# Altium PCB LMC (1).PcbDoc
Units mm, origin at the board's own origin, x right, y up, seen from the top; angles counter-clockwise.
Board outline 25.11 x 21.41 mm, 2 copper layers (Top Layer, Bottom Layer); 54 components, 27 nets, 122 pads, 19 vias.
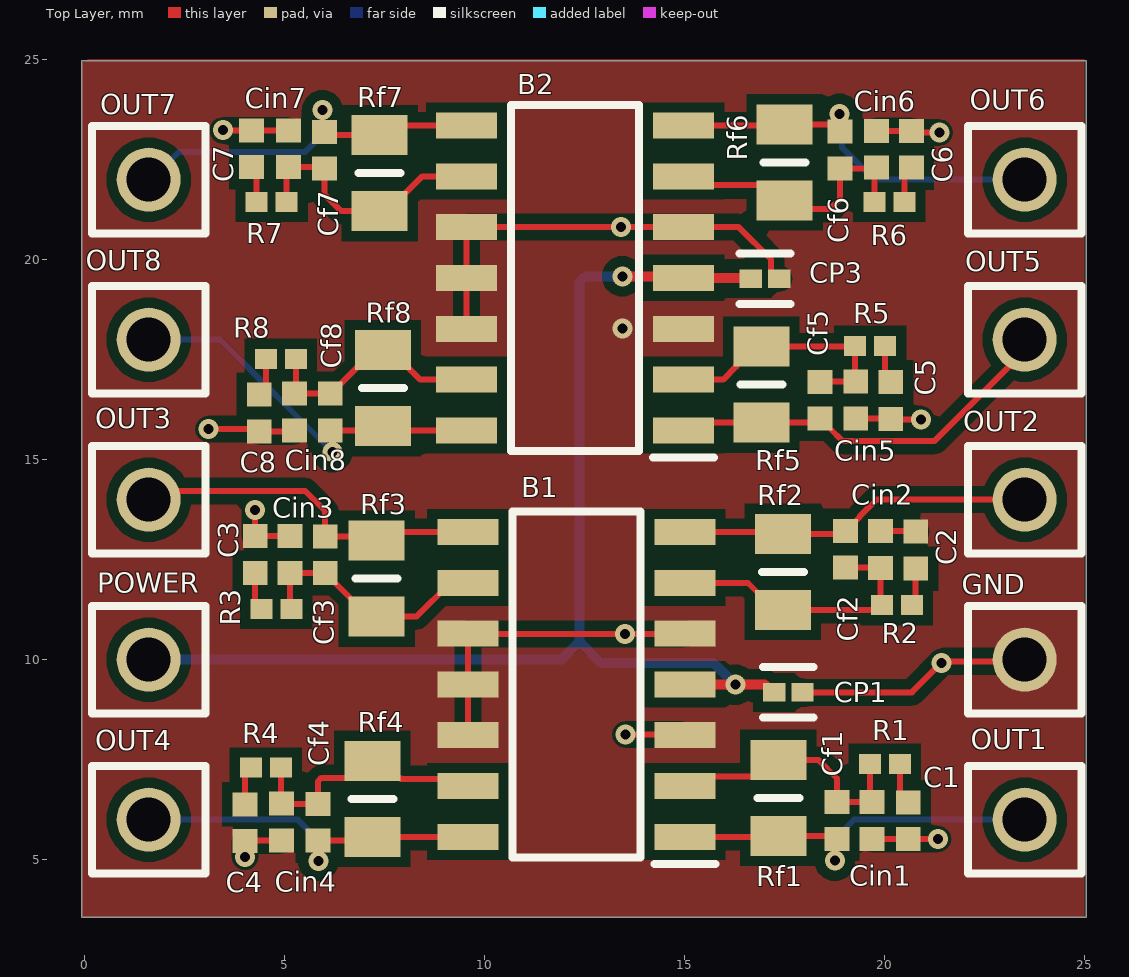
[diagram p0: Top Layer view]
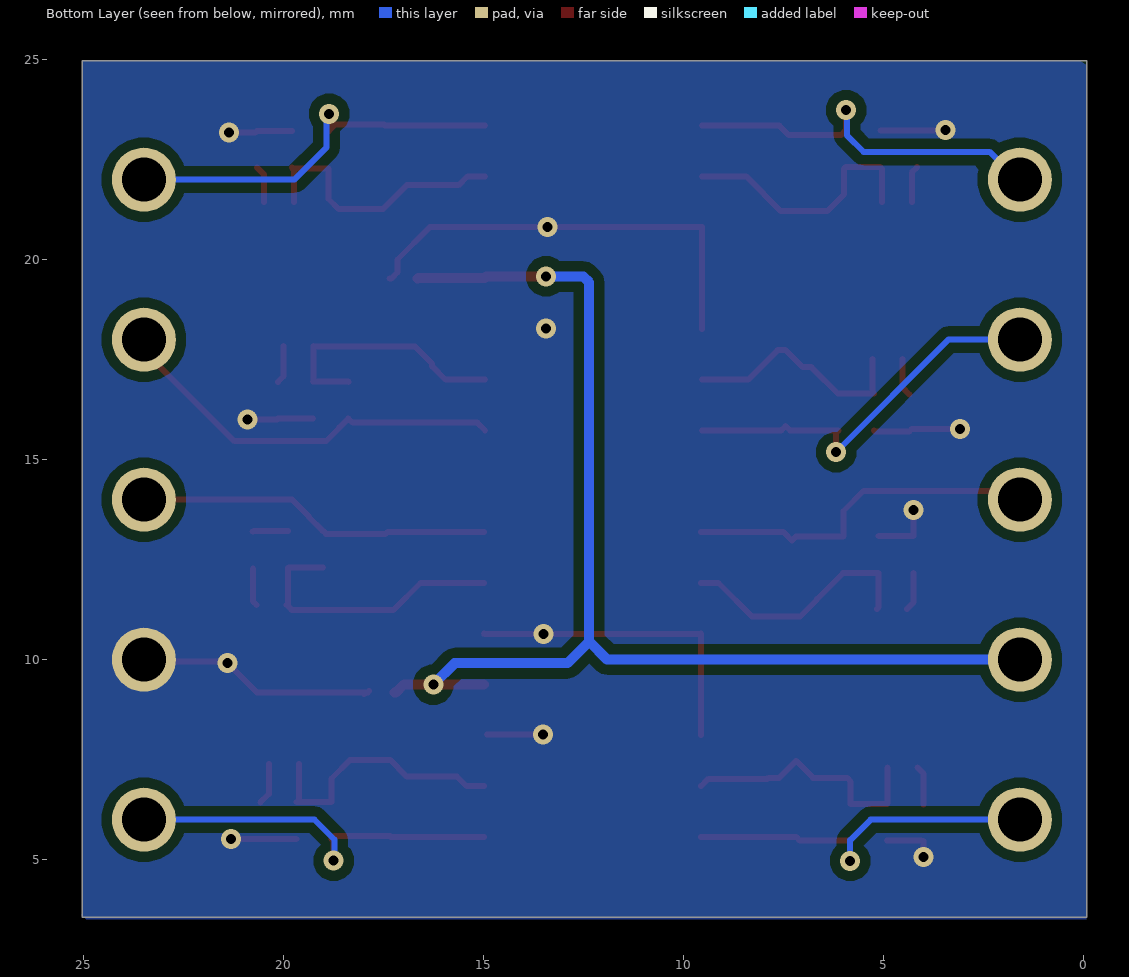
[diagram p1: Bottom Layer view, seen from below]

## Layer stack, top to bottom
Top Solder: solder mask 0.0102, Solder Resist, Dk 3.5
Top Layer: signal copper 0.0356
Dielectric 1: dielectric 0.32, FR-4, Dk 4.8
Bottom Layer: signal copper 0.0356
Bottom Solder: solder mask 0.0102, Solder Resist, Dk 3.5

## Board outline
-0.07,3.566 -0.07,24.978 25.043,24.978 25.043,3.566

## Design rules (kind name [scope] priority, off if disabled: settings)
Clearance [All] p1: gap=0.25 ignorepadtopadclearanceinfootprint=FALSE except(0.1: Arc-Text Track-Text SMDPad-Text THPad-Text Via-Text Fill-Text Poly-Text Region-Text Text-Text; 0.12: Arc-Arc Arc-Track Track-Track; 0.125: Arc-SMDPad Track-SMDPad; 0.15: Arc-Via Track-Via; 0.2: Arc-THPad Track-THPad)
HoleSize [All] p1: absolutevalues=TRUE maxlimit=0.5 minlimit=0.25 maxpercent=80.000 minpercent=20.000
HoleToHoleClearance [All] p1: gap=0.25 allowstackedmicrovias=TRUE
PolygonConnect [All] p1: connectstyle=Direct reliefconductorwidth=0.254 reliefentries=4 polygonreliefangle="90 Angle" airgapwidth=0.254
RoutingVias [All] p1: holewidth=0.25 width=0.5 viastyle="Through Hole" minholewidth=0.25 minwidth=0.5 maxholewidth=0.25 maxwidth=0.5
SilkToSolderMaskClearance [IsPad] p1: minsilkscreentomaskgap=0.1 clearancetoexposedcopper=TRUE
SolderMaskExpansion [All] p1: expansion=0.05 istentingtop=FALSE
SupplyNets "Schematic Supply Nets" [InNet('GND')] p1: voltage=0.000
Width [All] p1: maxlimit=0.15 minlimit=0.15 preferedwidth=0.15 minimp=50.000000 maximp=50.000000 favimp=50.000000
27 further rules are at their usual default settings.

## Components (designator, comment, footprint, x,y, rotation, side; value= is the part's Value field where it differs from the comment)
B1 "LMC6084IMX_NOPB" SOIC127P600X175-14N 12.29,9.381 r180 top
B2 "LMC6084IMX_NOPB" SOIC127P600X175-14N 12.26,19.542 r180 top
C1 "GJM1555C1HR20WB01D" CAPC1005X55N 20.587,5.971 r90 top
C2 "GJM1555C1HR20WB01D" CAPC1005X55N 20.774,12.738 r270 top
C3 "GJM1555C1HR20WB01D" CAPC1005X55N 4.261,12.631 r270 top
C4 "GJM1555C1HR20WB01D" CAPC1005X55N 4.005,5.923 r90 top
C5 "GJM1555C1HR20WB01D" CAPC1005X55N 20.152,16.482 r90 top
C6 "GJM1555C1HR20WB01D" CAPC1005X55N 20.669,22.761 r270 top
C7 "GJM1555C1HR20WB01D" CAPC1005X55N 4.169,22.774 r270 top
C8 "GJM1555C1HR20WB01D" CAPC1005X55N 4.364,16.169 r90 top
Cf1 "GJM1555C1HR20WB01D" CAPC1005X55N 18.809,5.983 r90 top
Cf2 "GJM1555C1HR20WB01D" CAPC1005X55N 19.019,12.761 r270 top
Cf3 "GJM1555C1HR20WB01D" CAPC1005X55N 6.011,12.621 r270 top
Cf4 "GJM1555C1HR20WB01D" CAPC1005X55N 5.83,5.934 r90 top
Cf5 "GJM1555C1HR20WB01D" CAPC1005X55N 18.384,16.486 r90 top
Cf6 "GJM1555C1HR20WB01D" CAPC1005X55N 18.885,22.745 r270 top
Cf7 "GJM1555C1HR20WB01D" CAPC1005X55N 5.992,22.736 r270 top
Cf8 "GJM1555C1HR20WB01D" CAPC1005X55N 6.138,16.189 r90 top
Cin1 "GJM1555C1HR20WB01D" CAPC1005X55N 19.681,5.978 r90 top
Cin2 "GJM1555C1HR20WB01D" CAPC1005X55N 19.898,12.751 r270 top
Cin3 "GJM1555C1HR20WB01D" CAPC1005X55N 5.133,12.631 r270 top
Cin4 "GJM1555C1HR20WB01D" CAPC1005X55N 4.918,5.944 r90 top
Cin5 "GJM1555C1HR20WB01D" CAPC1005X55N 19.276,16.488 r90 top
Cin6 "GJM1555C1HR20WB01D" CAPC1005X55N 19.794,22.761 r270 top
Cin7 "GJM1555C1HR20WB01D" CAPC1005X55N 5.092,22.774 r270 top
Cin8 "GJM1555C1HR20WB01D" CAPC1005X55N 5.246,16.189 r90 top
CP1 "GRM0335C1ER10WA01D" FP-GRM033-0_03-IPC_A 17.593,9.184 r0 top
CP3 "GRM0335C1ER10WA01D" FP-GRM033-0_03-IPC_A 17.008,19.525 r0 top
GND "61300111121" 61300111121 23.5,10 r0 top
OUT1 "61300111121" 61300111121 23.5,6 r0 top
OUT2 "61300111121" 61300111121 23.5,14 r0 top
OUT3 "61300111121" 61300111121 1.6,14 r0 top
OUT4 "61300111121" 61300111121 1.6,6 r0 top
OUT5 "61300111121" 61300111121 23.5,18 r0 top
OUT6 "61300111121" 61300111121 23.5,22 r0 top
OUT7 "61300111121" 61300111121 1.6,22 r0 top
OUT8 "61300111121" 61300111121 1.6,18 r0 top
POWER "61300111121" 61300111121 1.6,10 r0 top
R1 "CRG0402F470K" RESC1005X40X25LL10T10 20.003,7.397 r180 top
R2 "CRG0402F470K" RESC1005X40X25LL10T10 20.304,11.366 r180 top
R3 "CRG0402F470K" RESC1005X40X25LL10T10 4.791,11.271 r0 top
R4 "CRG0402F470K" RESC1005X40X25LL10T10 4.531,7.3 r180 top
R5 "CRG0402F470K" RESC1005X40X25LL10T10 19.635,17.844 r180 top
R6 "CRG0402F470K" RESC1005X40X25LL10T10 20.12,21.447 r180 top
R7 "CRG0402F470K" RESC1005X40X25LL10T10 4.676,21.445 r0 top
R8 "CRG0402F470K" RESC1005X40X25LL10T10 4.905,17.518 r180 top
Rf1 "RHC20100GMTP" RESC2012X65N 17.344,6.544 r270 top
Rf2 "RHC20100GMTP" RESC2012X65N 17.456,12.194 r90 top
Rf3 "RHC20100GMTP" RESC2012X65N 7.296,12.027 r90 top
Rf4 "RHC20100GMTP" RESC2012X65N 7.194,6.518 r270 top
Rf5 "RHC20100GMTP" RESC2012X65N 16.918,16.874 r270 top
Rf6 "RHC20100GMTP" RESC2012X65N 17.499,22.431 r90 top
Rf7 "RHC20100GMTP" RESC2012X65N 7.376,22.165 r90 top
Rf8 "RHC20100GMTP" RESC2012X65N 7.455,16.79 r270 top

## Footprints (in the part's own frame and the unit in brackets; to place one, negate y for a bottom-side part, rotate by r counter-clockwise, add the part's x,y. Pads: shape width x height; smd on the part's side, far side on the other; paste and mask are expansions set on the pad)
61300111121 [mm] "Pin Header, pitch 2.54 mm, THT, Vertical, single row, 1p"
  round 1.6 hole 1.1: 1(0,0)
  silkscreen extent -1.42,-1.35 1.42,1.35, body extent -1.27,-1.27 1.27,1.27, height 8.57
CAPC1005X55N [mm]
  rect 0.6x0.62 smd: 1(-0.46,0) 2(0.46,0)
FP-GRM033-0_03-IPC_A [mm]
  rect 0.554x0.463 smd paste+0 mask+0: 1(-0.354,0) 2(0.354,0)
  silkscreen extent -0.63,-0.63 0.63,0.63, body extent -0.83,-0.43 0.83,0.43, height 0.25
RESC1005X40X25LL10T10 [mm] "Chip Resistor, 2-Leads, Body 1.00x0.50mm, IPC High Density"
  rect 0.55x0.5 smd: 1(-0.375,0) 2(0.375,0)
  body extent -0.55,-0.3 0.55,0.3, height 0.4
RESC2012X65N [mm]
  rect 1x1.4 smd: 1(-0.95,0) 2(0.95,0)
  silkscreen extent 0,-0.53 0,0.53
SOIC127P600X175-14N [mm] "LMC6084"
  rect 1.525x0.65 smd: 1(-2.712,3.81) 2(-2.712,2.54) 3(-2.712,1.27) 4(-2.712,0) 5(-2.712,-1.27) 6(-2.712,-2.54) 7(-2.712,-3.81) 8(2.712,-3.81) 9(2.712,-2.54) 10(2.712,-1.27) 11(2.712,0) 12(2.712,1.27) 13(2.712,2.54) 14(2.712,3.81)
  silkscreen extent -3.47,-4.33 1.6,4.48

## Part data
B1 B2: "Precision CMOS Quad Operational Amplifier", Arrow Part Number=LMC6084IMX/NOPB, Manufacturer_Name="Texas Instruments", Mouser Part Number=926-LMC6084IMX/NOPB, Arrow Price/Stock=https://www.arrow.com/en/products/lmc6084imxnopb/texas-instruments, Datasheet Link=http://www.ti.com/lit/gpn/LMC6084, Geometry.Height=1.75mm, Manufacturer_Part_Number=LMC6084IMX/NOPB, Mouser Price/Stock=https://www.mouser.com/Search/Refine.aspx?Keyword=926-LMC6084IMX%2FNOPB
C1 C2 C3 C4 C5 C6 C7 C8 Cf1 Cf2 Cf3 Cf4 Cf5 Cf6 Cf7 Cf8 Cin1 Cin2 Cin3 Cin4 Cin5 Cin6 Cin7 Cin8: "Capacitor GJM15_0.10 L=1.0mm W=0.5mm T=0.5mm", Manufacturer_Name="Murata Electronics", Mouser Part Number=81-GJM1555C1HR20WB01, Arrow Part Number=GJM1555C1HR20WB01D, Arrow Price/Stock=https://www.arrow.com/en/products/gjm1555c1hr20wb01d/murata-manufacturing?region=nac, Datasheet Link=https://search.murata.co.jp/Ceramy/image/img/A01X/G101/ENG/GJM1555C1HR20WB01-01A.pdf, Geometry.Height=0.55mm, Manufacturer_Part_Number=GJM1555C1HR20WB01D, Mouser Price/Stock=https://www.mouser.co.uk/ProductDetail/Murata-Electronics/GJM1555C1HR20WB01D?qs=FE4FjJMnrEJXJfS2X%252B8lsg%3D%3D
CP1 CP3: library part CMP-2010-01060-2, "Chip Multilayer Ceramic Capacitors for General Purpose, 0201, 0.10pF, C0G, 30ppm/°C, 0.05pF, 25V", Capacitance=0.1pF, Case Code (Imperial)=0201, Case Code (Metric)=0603, Dielectric=C0G, Max Operating Temperature=125°C, Min Operating Temperature=-55°C, Package Quantity=15000, Voltage Rating=25V, Case/Package=0201, Height=0.3mm, Lead Free="Lead Free", Length=0.024inch, Mount="Surface Mount", Packaging="Tape and Reel", Termination=SMD/SMT, Thickness=0.013inch, Voltage Rating (DC)=25V, Width=0.012inch
GND OUT1 OUT2 OUT3 OUT4 OUT5 OUT6 OUT7 OUT8 POWER: library part CMP-1502-01058-4, "THT Vertical Pin Header WR-PHD, Pitch 2.54 mm, Single Row, 1 pins", Color=Black, Contact Resistance=20mΩ, Current Rating=3A, Operating Supply Voltage=250V, Connector Type="Male Pin", Contact Material=Copper, Contact Mating Length=5.9944mm, Contact Plating=Gold, Gender=Male, Lead Pitch=2.54mm, Mount="Through Hole", Number of Contacts=1, Number of Pins=1, Number of Positions=1, Number of Rows=1, Orientation=Vertical, Packaging=Bulk, RoHS=Compliant, Termination=Solder
R1 R2 R3 R4 R5 R6 R7 R8: library part CMP-2002-05737-1, Manufacturer="TE Connectivity / AMP", Part Number=CRG0402F470K
Rf1 Rf2 Rf3 Rf4 Rf5 Rf6 Rf7 Rf8: "Thick Film Resistors - SMD 0805 100G 20%", Manufacturer_Name=Kamaya, Mouser Part Number=791-RHC20100GMTP, Datasheet Link=https://eu.mouser.com/datasheet/2/210/kamaya_products_RHC__english_20170203_112609-1842538.pdf, Geometry.Height=0.65mm, Manufacturer_Part_Number=RHC20100GMTP, Mouser Price/Stock=https://www.mouser.co.uk/ProductDetail/Kamaya/RHC20100GMTP?qs=JZJGM%252BYuqVpxyCC7WQOUCw%3D%3D

## Via types
v1: diameter 0.5, hole 0.25, Top Layer to Bottom Layer, 19 vias

## Nets (pads, with @x,y where several pads share a name; then routed paths per layer and width w, separated by ;. In a path a pad name is that pad's centre, name@x,y a point inside that pad or via, vN(x,y) a via of type N, cw(c..) or ccw(c..) an arc to the next point about the centre after c; other vN are vias at no path point)
GND: B1.3 B1.5 B1.10 B1.11 B1.12 B2.3 B2.5 B2.10 B2.11 B2.12 C1.1 C2.1 C3.1 C4.1 C5.1 C6.1 C7.1 C8.1 Cin1.1 Cin2.1 Cin3.1 Cin4.1 Cin5.1 Cin6.1 Cin7.1 Cin8.1 CP1.2 CP3.2 GND.1 | length 38.9
  Top Layer w0.15: v1(3.1,15.764) 4.308,15.764 C8.1 5.225,15.709 Cin8.1 ; v1@3.457,23.234 C7.1 ; C4.1 4.01,5.458 v1(4.01,5.069) ; C4.1@4.025,5.443 4.065,5.484 Cin4.1 ; C7.1@4.172,23.231 Cin7.1@5.089,23.231 ; v1(4.26,13.743) C3.1 C3.1 Cin3.1 ; B2.12 B2.11 B2.10 v1(13.413,20.812) B2.5 ; B1.12 B1.11 B1.10 9.592,10.637 v1(13.505,10.637) 14.988,10.637 B1.5 ; v1(13.518,8.131) B1.3@14.927,8.131 ; B2.5 16.351,20.812 17.16,20.003 17.16,19.681 17.316,19.525 CP3.2 ; CP1.2@17.872,9.212 17.901,9.184 CP1.2 ; CP1.2@17.993,9.138 CP1.2 ; Cin5.1 20.145,16.028 20.163,16.01 v1(20.909,16.01) ; Cin1.1 20.58,5.518 C1.1 20.591,5.515 v1(21.328,5.515) ; Cin6.1 C6.1 20.713,23.177 v1(21.37,23.177) ; Cin2.1 20.761,13.211 C2.1 C2.1@20.784,13.198 ; GND.1 23.461,9.961 21.454,9.961 v1(21.414,9.921) 20.677,9.184 CP1.2
  other v1: 13.449,18.281 3.455,23.236
INV_A1: B1.2 Cf1.2 Cin1.2 R1.2 Rf1.1 | length 6.7
  Top Layer w0.15: B1.2@14.996,6.837 15.433,6.837 15.671,7.075 16.925,7.075 Rf1.1 18.343,7.494 18.809,7.028 Cf1.2 19.676,6.443 Cin1.2 19.628,6.491 R1.2
INV_A2: B2.2 Cf5.2 Cin5.2 R5.2 Rf5.1 | length 6.5
  Top Layer w0.15: B2.2 15.96,17.002 16.293,17.335 16.293,17.399 16.718,17.824 Rf5.1 19.239,17.824 R5.2 19.26,16.964 Cin5.2 18.387,16.948 Cf5.2
INV_B1: B1.6 Cf2.2 Cin2.2 R2.2 Rf2.1 | length 7.1
  Top Layer w0.15: B1.6@14.996,11.917 16.583,11.917 17.256,11.244 Rf2.1 19.807,11.244 R2.2 19.898,11.396 Cin2.2 19.889,12.301 Cf2.2
INV_B2: B2.6 Cf6.2 Cin6.2 R6.2 Rf6.1 | length 6.9
  Top Layer w0.15: B2.6 15.41,22.082 15.631,21.861 16.928,21.861 17.517,21.272 18.639,21.272 18.885,21.518 Cf6.2 19.778,22.285 Cin6.2 19.745,22.251 R6.2
INV_C1: B1.9 Cf3.2 Cin3.2 R3.2 Rf3.1 | length 6.2
  Top Layer w0.15: R3.2 5.133,11.304 Cin3.2 6.002,12.171 Cf3.2 6.021,12.161 6.671,11.511 6.671,11.502 7.096,11.077 Rf3.1 8.294,11.077 9.134,11.917 B1.9@9.572,11.917
INV_C2: B2.9 Cf7.2 Cin7.2 R7.2 Rf7.1 | length 6.5
  Top Layer w0.15: R7.2 5.051,22.272 Cin7.2 5.954,22.314 Cf7.2 5.992,21.638 6.415,21.215 7.576,21.215 8.443,22.082 B2.9
INV_D1: B1.13 Cf4.2 Cin4.2 R4.1 Rf4.1 | length 6.6
  Top Layer w0.15: R4.1 4.906,6.415 Cin4.2 4.928,6.394 Cf4.2 5.83,6.955 5.918,7.043 6.769,7.043 Rf4.1 7.619,7.043 7.886,7.043 7.907,7.022 9.387,7.022 B1.13@9.572,6.837
INV_D2: B2.13 Cf8.2 Cin8.2 R8.1 Rf8.1 | length 5.9
  Top Layer w0.15: R8.1 5.28,16.684 Cin8.2 Cf8.2 6.148,16.649 6.813,17.315 7.03,17.315 Rf8.1 7.655,17.74 8.393,17.002 B2.13
NetC1_2: C1.2 R1.1 | length 1.1
  Top Layer w0.15: R1.1 20.378,6.64 C1.2
NetC2_2: C2.2 R2.1 | length 1
  Top Layer w0.15: R2.1 20.774,11.461 C2.2
NetC3_2: C3.2 R3.1 | length 1
  Top Layer w0.15: C3.2 4.261,11.426 R3.1
NetC4_2: C4.2 R4.2 | length 1
  Top Layer w0.15: C4.2 4.005,7.149 R4.2
NetC5_2: C5.2 R5.1 | length 1
  Top Layer w0.15: R5.1 20.01,17.084 C5.2
NetC6_2: C6.2 R6.1 | length 0.9
  Top Layer w0.15: R6.1 20.495,22.126 C6.2
NetC7_2: C7.2 R7.1 | length 0.9
  Top Layer w0.15: C7.2 4.301,22.182 R7.1
NetC8_2: C8.2 R8.2 | length 1
  Top Layer w0.15: C8.2 4.53,16.795 R8.2
OUTPUT1: B1.1 Cf1.1 OUT1.1 Rf1.2 | length 9.9
  Top Layer w0.15: B1.1 17.321,5.571 Rf1.2 18.737,5.594 Cf1.1 18.755,5.47 v1(18.755,4.974)
  Bottom Layer w0.15: v1(18.755,4.974) 18.734,4.995 18.734,5.501 19.233,6 OUT1.1
OUTPUT2: B1.7 Cf2.1 OUT2.1 Rf2.2 | length 8.9
  Top Layer w0.15: B1.7 17.409,13.191 Rf2.2 18.942,13.144 Cf2.1 19.029,13.221 19.388,13.58 19.388,13.594 19.794,14 OUT2.1
OUTPUT3: B1.8 Cf3.1 OUT3.1 Rf3.2 | length 9
  Top Layer w0.15: OUT3.1 1.818,14.218 5.509,14.218 6.01,13.717 Cf3.1@6.01,13.081 ; Cf3.1 7.192,13.081 Rf3.2 7.507,13.187 B1.8@9.572,13.187
OUTPUT4: B1.14 Cf4.1 OUT4.1 Rf4.2 | length 9.3
  Top Layer w0.15: v1(5.842,4.968) 5.842,5.462 Cf4.1 7.1,5.474 Rf4.2 9.571,5.568 B1.14@9.572,5.567
  Bottom Layer w0.15: OUT4.1 5.329,6 5.842,5.487 v1(5.842,4.968)
OUTPUT5: B2.1 Cf5.1 OUT5.1 Rf5.2 | length 10.1
  Top Layer w0.15: B2.1 15.164,15.924 Rf5.2 18.282,15.924 Cf5.1 18.394,16.026 18.619,15.801 18.619,15.792 18.948,15.463 21.24,15.463 23.5,17.723 OUT5.1
OUTPUT6: B2.7 Cf6.1 OUT6.1 Rf6.2 | length 10.2
  Top Layer w0.15: B2.7 17.471,23.352 Rf6.2 18.709,23.381 Cf6.1 18.87,23.22 v1(18.87,23.646)
  Bottom Layer w0.15: v1(18.87,23.646) 18.938,23.578 18.938,22.8 19.738,22 OUT6.1
OUTPUT7: B2.8 Cf7.1 OUT7.1 Rf7.2 | length 9.7
  Top Layer w0.15: v1(5.944,23.738) 5.944,23.243 6.073,23.115 Rf7.2 7.613,23.352 B2.8
  Bottom Layer w0.15: OUT7.1 1.663,22 2.356,22.693 5.509,22.693 5.925,23.109 5.925,23.68 5.935,23.69 5.935,23.729 v1(5.944,23.738)
OUTPUT8: B2.14 Cf8.1 OUT8.1 Rf8.2 | length 9.8
  Top Layer w0.15: Cf8.1@6.128,15.729 7.345,15.729 Rf8.2 7.563,15.732 B2.14 ; Cf8.1 6.195,15.672 v1(6.195,15.191)
  Bottom Layer w0.15: OUT8.1 3.386,18 v1(6.195,15.191)
V+: B1.4 B2.4 CP1.1 CP3.1 POWER.1 | length 31
  Top Layer w0.25: v1(13.443,19.583) 14.931,19.583 B2.4 16.636,19.542 CP3.1 ; B1.4 15.007,9.376 17,9.376 17.193,9.184 CP1.1
  Bottom Layer w0.25: POWER.1 11.916,10 12.368,10.452 ; v1(13.443,19.583) 13.441,19.581 12.514,19.581 12.368,19.435 12.368,10.452 ; v1(16.264,9.376) 15.73,9.911 12.909,9.911 12.368,10.452
V+: 

## Polygon pours and split planes (outlines as drawn)
GND on Top Layer "GND_L01_P000" (solid, pour order 0): -0.066,24.972 -0.032,25.007 24.993,25.007 24.993,3.578 24.994,3.578 -0.082,3.578 -0.082,24.903 -0.048,24.937
GND on Bottom Layer "GND_L02_P001" (solid, pour order 1): -0.054,24.956 -0.042,24.967 25.033,24.967 25.033,3.652 25.062,3.623 24.945,3.507 -0.062,3.507 -0.062,24.851 -0.033,24.88